# Allegro board remotepanasonicDB9.brd
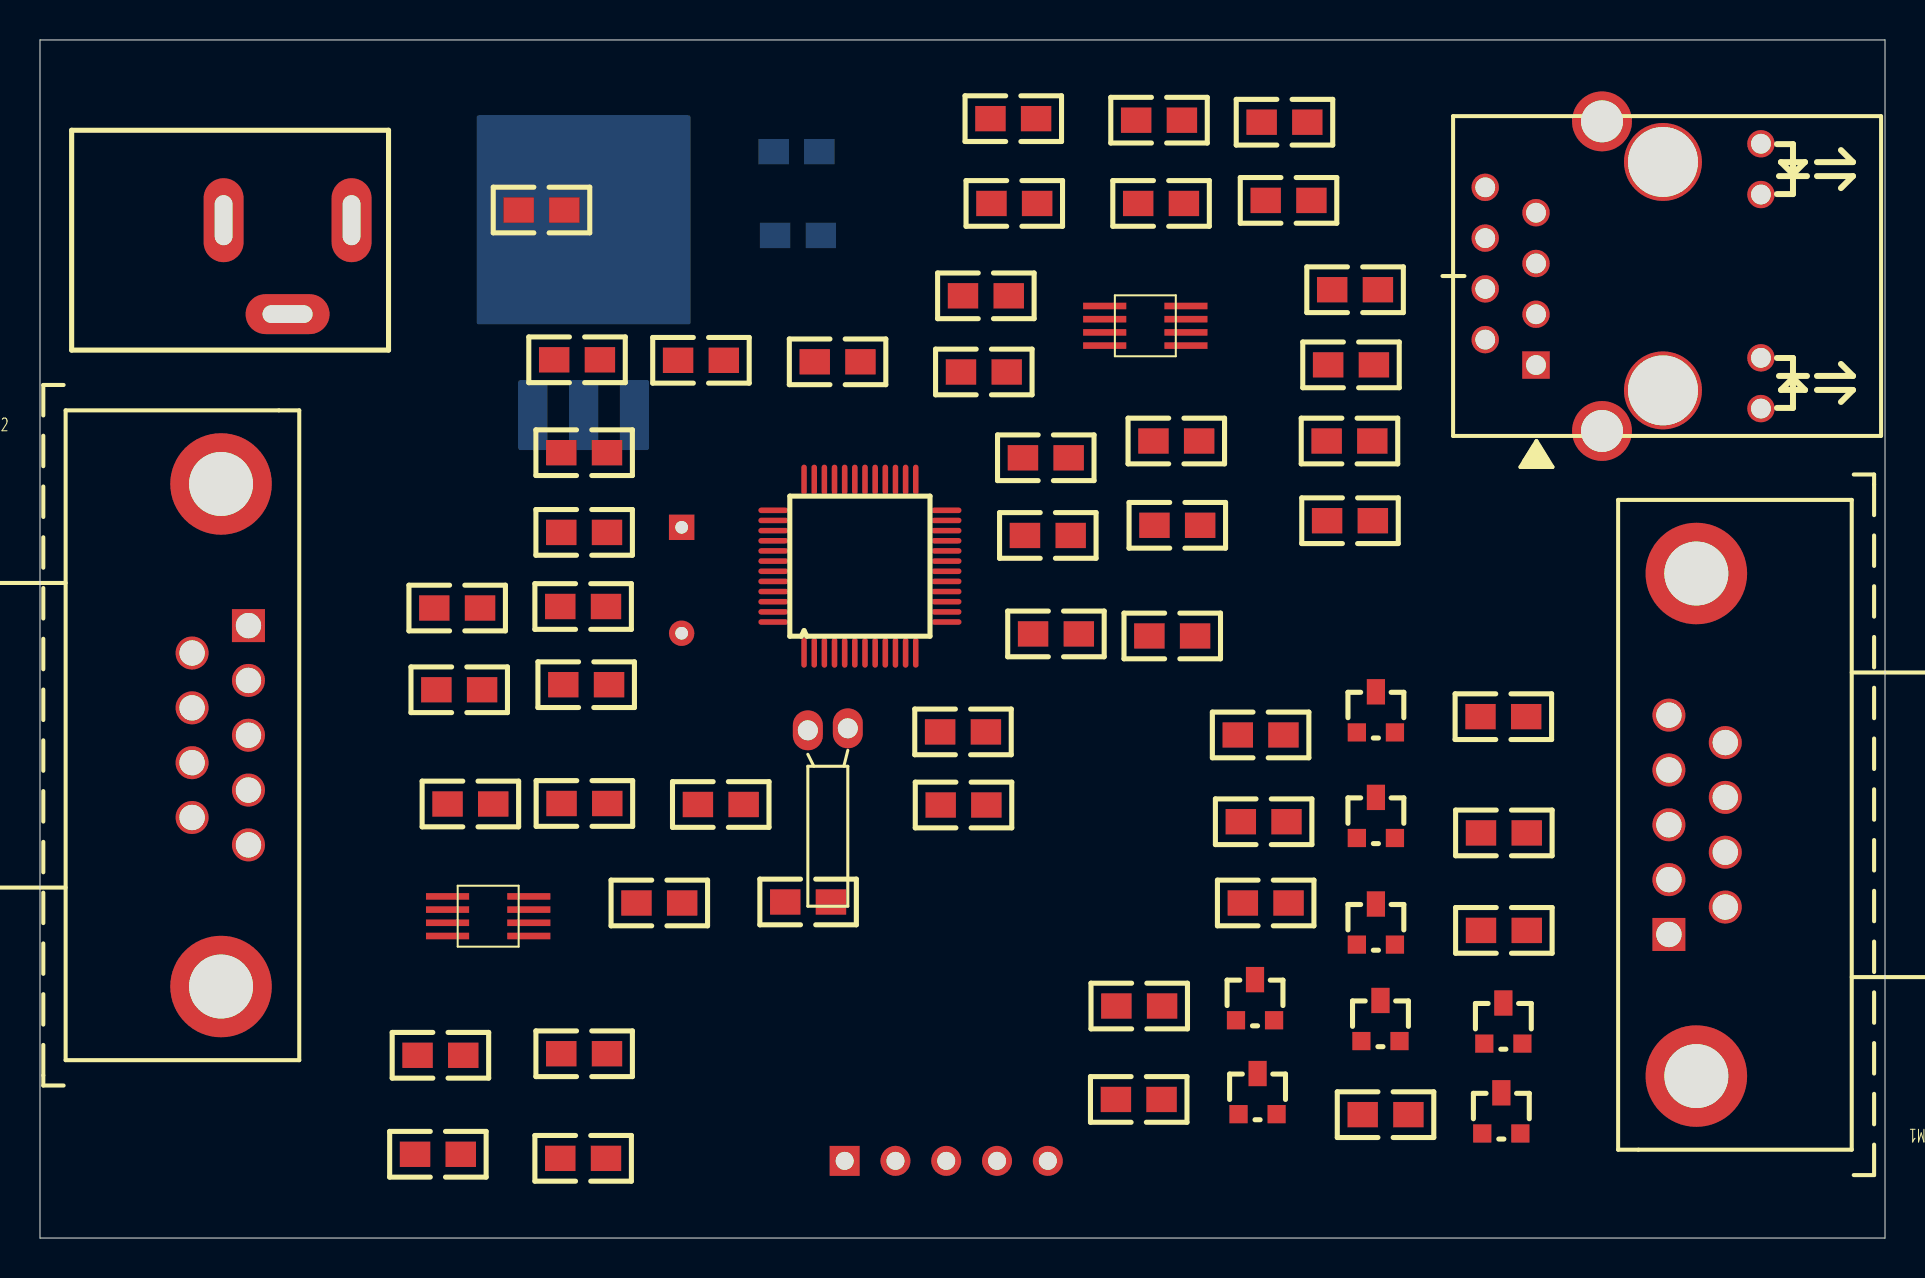
[diagram p0: board, top side]
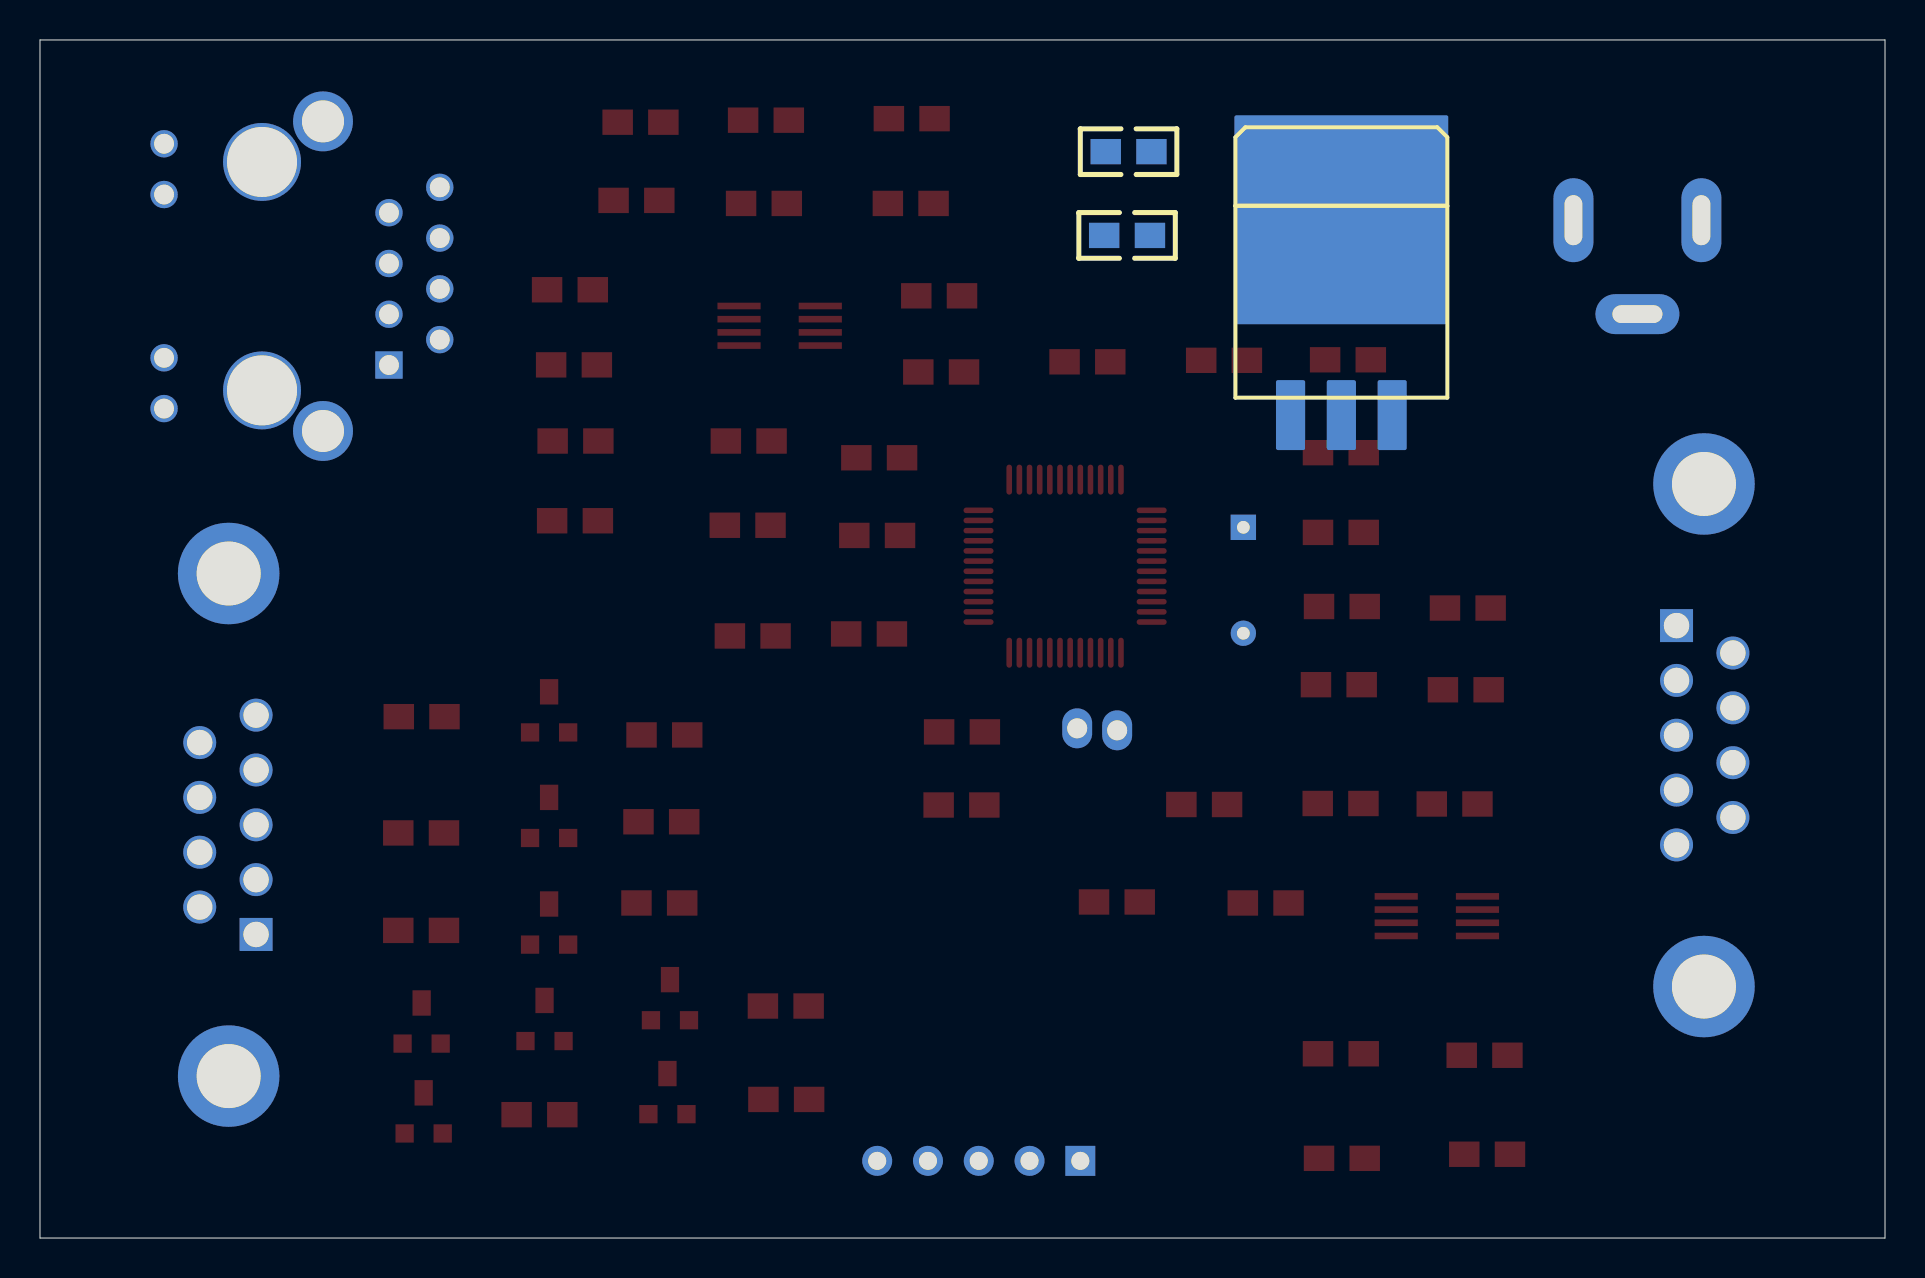
[diagram p1: board, bottom side, seen from below]

Outline 92.28 x 59.94 mm; copper layers: TOP, BOTTOM. Coordinates in mm from the lower left corner of the outline.
Outline path: 0,59.94 92.28,59.94 92.28,0 0,0 0,59.94

## Placement (name value [footprint] x y rotation side)
C1  20p  [0805]  27.32 27.69 0 top
C2  20p  [0805]  27.17 31.6 0 top
C3  10u  [0805]  26.86 43.94 0 top
C4  10U  [0805]  37.83 54.36 180 bottom
C5  22U  [0805]  37.91 50.16 180 bottom
C6  20p  [0805]  46.16 25.32 0 top
C7  20p  [0805]  34.05 21.69 0 top
C8  10u  [0805]  50.81 30.23 0 top
C9  0.1u  [0805]  47.21 43.33 0 top
C10  0.1u  [0805]  50.41 35.15 0 top
C11  0.1u  [0805]  38.42 16.81 0 top
COM1  BOXCONN_DB9  [DB9RA_M]  81.47 20.68 180 top
COM2  BOXCONN_DB9  [DB9RA_M]  10.43 25.16 0 top
IED1  <Value>  [HDR1X5]  40.25 3.86 0 top
L1  IND_MOLDED  [0805]  39.89 43.84 0 top
LED_3.1  RED  [0805]  62.45 51.92 0 top
LED_3.2  RED  [0805]  56.07 51.77 0 top
LED_3.3  RED  [0805]  20.03 9.14 0 top
LED_3.4  RED  [0805]  27.22 9.22 0 top
LED_3.5  RED  [0805]  55.97 55.93 0 top
Q1  2N7002LT1  [SOT23_B]  66.81 26.29 0 top
Q2  2N7002LT1  [SOT23_B]  66.81 21.01 0 top
Q3  2N7002LT1  [SOT23_B]  66.81 15.67 0 top
Q4  2N7002LT1  [SOT23_B]  73.19 10.72 0 top
Q5  2N7002LT1  [SOT23_B]  60.77 11.89 0 top
Q6  2N7002LT1  [SOT23_B]  60.9 7.19 0 top
Q7  2N7002LT1  [SOT23_B]  73.09 6.22 0 top
Q8  2N7002LT1  [SOT23_B]  67.04 10.85 0 top
R1  33  [0805]  27.22 39.29 0 top
R2  1M  [0805]  27.22 35.31 0 top
R3  10k  [0805]  33.06 43.92 0 top
R4  10M  [0805]  46.19 21.67 0 top
R5  22  [0805]  56.88 35.66 0 top
R6  22  [0805]  56.63 30.12 0 top
R7  4.7k  [0805]  65.52 35.89 0 top
R8  10k  [0805]  56.83 39.88 0 top
R9  100  [0805]  65.49 39.88 0 top
R10  100  [0805]  65.57 43.69 0 top
R11  10k  [0805]  50.3 39.04 0 top
R12  330  [0805]  62.24 55.83 0 top
R13  4.7k  [0805]  73.19 26.09 0 top
R14  10k  [0805]  73.22 20.27 0 top
R15  15k  [0805]  73.22 15.39 0 top
R16  330  [0805]  48.73 51.77 0 top
R17  4.7k  [0805]  54.98 11.61 0 top
R18  10k  [0805]  54.95 6.93 0 top
R19  15k  [0805]  67.3 6.17 0 top
R25  4.7k  [0805]  65.77 47.45 0 top
R26  4.7k  [0805]  30.98 16.76 0 top
R27  100  [0805]  61.05 25.17 0 top
R28  4.7k  [0805]  61.2 20.83 0 top
R29  10k  [0805]  20.87 31.52 0 top
R30  10k  [0805]  20.97 27.43 0 top
R31  100  [0805]  61.3 16.76 0 top
R32  22  [0805]  21.53 21.72 0 top
R33  22  [0805]  27.23 21.74 0 top
R34  0  [0805]  47.31 47.14 0 top
R35  0  [0805]  25.08 51.44 0 top
R36  330  [0805]  19.9 4.19 0 top
R37  330  [0805]  27.17 3.99 0 top
R38  330  [0805]  48.68 56.01 0 top
U1  DC205A  [DC205]  15.58 50.93 270 top
U2  AMS1086CM-3.3  [TO262]  27.19 47.68 180 bottom
U3  NUC122LC1AN  [NUC122LQFP48]  38.21 29.29 0 top
U5  MAX488  [MAX485]  55.28 45.64 0 top
U8  MAX488  [MAX485]  22.42 16.1 0 top
U10  RJ45  [HR911105A]  70.68 48.13 270 top
Y1  12M  [XALTDIP2]  32.09 35.56 270 top
Y2  32k  [XTAL-3_4MM-2P]  40.7 25.6 180 top

## Library data of the parts
C1-C3 C6-C11 = CAPACITOR NON-POL
C4 C5 = CAP NP
COM1 COM2 = CONNECTOR DB9_1
IED1 = CON5
L1 R1-R11 R13-R15 R17-R19 R25-R35 = R
LED_3.1-LED_3.5 = LED
Q1-Q8 = NPN_3
R12 R16 R36-R38 = RES1
U1 = DC205A
U2 = AMS1117: Tolerance: RichardLC; User Part Number: pn
U3 = NUC122LC1AN
U5 U8 = MAX485
U10 = RJ45
Y1 Y2 = CRYSTAL

## Footprints (pads in the part's own frame, mm; a bottom-side part is the same pattern mirrored in y, then rotated)
0805
  rect 1.524x1.27 smd: 1(-1.143,0) 2(1.143,0)
DB9RA_M
  rect 1.651x1.651 hole 1.27: 1(0,5.486)
  round 1.651 hole 1.27: 2(0,2.743) 3(0,0) 4(0,-2.743) 5(0,-5.486) 6(-2.819,4.115) 7(-2.819,1.372) 8(-2.819,-1.372) 9(-2.819,-4.115)
  round 5.08 hole 3.2: 10(-1.372,12.573) 11(-1.372,-12.573)
DC205
  oval 4.2x2 hole 2.5x0.889: 1(0,0) 2(0,-6.4)
  oval 2x4.2 hole 0.889x2.5: 3(4.7,-3.2)
HDR1X5
  rect 1.5x1.5 hole 0.9: 1(0,0)
  round 1.5 hole 0.9: 2(2.54,0) 3(5.08,0) 4(7.62,0) 5(10.16,0)
HR911105A
  round 3.9 hole 3.5 unplated: (-5.707,10.498) (5.723,10.498)
  rect 1.372x1.372 hole 0.991: 1(4.453,4.148)
  round 1.372 hole 0.991: 2(3.183,1.608) 3(1.913,4.148) 4(0.643,1.608) 5(-0.627,4.148) 6(-1.897,1.608) 7(-3.167,4.148) 8(-4.437,1.608) 9(6.633,15.398) 10(4.093,15.398) 11(-4.077,15.398) 12(-6.617,15.398)
  round 2.997 hole 2.1: M3(-7.737,7.448) M4(7.753,7.448)
MAX485
  rect 2.159x0.33 smd: 1(-2.032,0.991) 2(-2.032,0.33) 3(-2.032,-0.33) 4(-2.032,-0.991) 5(2.032,-0.991) 6(2.032,-0.33) 7(2.032,0.33) 8(2.032,0.991)
NUC122LQFP48
  oval 0.279x1.5 smd: 1(0,0) 2(0.508,0) 3(1.016,0) 4(1.524,0) 5(2.032,0) 6(2.54,0) 7(3.048,0) 8(3.556,0) 9(4.064,0) 10(4.572,0) 11(5.08,0) 12(5.588,0) 25(5.588,8.66) 26(5.08,8.66) 27(4.572,8.66) 28(4.064,8.66) 29(3.556,8.66) 30(3.048,8.66) 31(2.54,8.66) 32(2.032,8.66) 33(1.524,8.66) 34(1.016,8.66) 35(0.508,8.66) 36(0,8.66)
  oval 1.5x0.279 smd: 13(7.124,1.536) 14(7.124,2.044) 15(7.124,2.552) 16(7.124,3.06) 17(7.124,3.568) 18(7.124,4.076) 19(7.124,4.584) 20(7.124,5.092) 21(7.124,5.6) 22(7.124,6.108) 23(7.124,6.616) 24(7.124,7.124) 37(-1.536,7.124) 38(-1.536,6.616) 39(-1.536,6.108) 40(-1.536,5.6) 41(-1.536,5.092) 42(-1.536,4.584) 43(-1.536,4.076) 44(-1.536,3.568) 45(-1.536,3.06) 46(-1.536,2.552) 47(-1.536,2.044) 48(-1.536,1.536)
SOT23_B
  rect 0.914x1.27 smd: D(0,1.041)
  rect 0.914x0.914 smd: G(-0.953,-0.991) S(0.953,-0.991)
TO262
  custom 1.46x3.5 smd: 1(-2.54,-6.5) 2(0,-6.5) 3(2.54,-6.5)
  custom 10.7x10.46 smd: 4(0,3.27)
XALTDIP2
  rect 1.27x1.27 hole 0.635: 1(0,0)
  round 1.27 hole 0.635: 2(5.3,0)
XTAL-3_4MM-2P
  oval 1.5x2 hole 1: 1(0.3,0.1) 2(2.3,0.2)

## Nets
GND: C4.2 C5.2 COM1.1 COM2.5 COM2.6 IED1.5 LED_3.2.2 Q4.S Q8.S R13.1 R14.1 R15.1 R17.1 R18.1 R19.1 R34.1 R35.1 U1.2(GND) U2.1(GND) U10.1
GND_POWER: C1.1 C2.1 C3.1 C6.1 C7.1 C8.1 C9.1 C10.1 C11.1 R8.1 R11.1 R25.1 R28.1 R29.1 R30.1 U3.1(PVSS) U3.12(VSS) U5.4(GND) U8.4(GND)
VCC: C5.1 C9.2 C11.2 IED1.1 L1.2 R3.1 R7.2 R12.1 R16.1 R26.2 R36.1 R37.1 R38.1 U2.2(VOUT) U2.4(TAB) U3.11(VDD) U3.13(VBUS) U5.1(VCC) U8.1(VCC)
VCC5: C4.1 U1.1(VCC) U2.3(VIN)
422AI: R7.1 R9.1 U5.8(A) U10.6
422AO: COM1.2 R26.1 R27.1 U8.8(A)
422BI: R9.2 R25.2 U5.7(B) U10.3
422BO: COM1.5 R27.2 R28.2 U8.7(B)
422YI: R10.2 U5.5(Y) U10.5
422YO: COM1.3 R31.2 U8.5(Y)
422ZI: R10.1 U5.6(Z) U10.4
422ZO: COM1.9 R31.1 U8.6(Z)
A_AUDIO: COM2.7 Q4.D
A_AUDIO-1: Q8.D
A_INPUT: Q4.G U3.26(PC12)
A_INPUT1: Q8.G U3.41(PD3)
B_AUDIO: COM2.2 Q1.D Q2.D Q3.D
B_AUDIO-1: COM2.4 Q5.D Q6.D Q7.D
B_NET1: Q1.G U3.22(PC0/SPISS00)
B_NET2: Q2.G U3.21(PC1/SPICLK0)
B_NET3: Q3.G U3.20(PC2/MISO00)
B_NET11: Q5.G U3.38(PD0)
B_NET21: Q6.G U3.39(PD1)
B_NET31: Q7.G U3.40(PD2)
ICECLK: IED1.3 U3.36(ICE_CK)
ICEDATA: IED1.2 U3.35(ICE_DAT)
ICEREST: C3.2 IED1.4 R3.2 U3.46(/RESET)
PC8: LED_3.1.2 U3.30(PC8/SPISS10)
PC9: LED_3.3.2 U3.29(PC9/SPICLK1)
PC10: LED_3.4.2 U3.28(PC10/MISO10)
PC11: LED_3.5.2 U3.27(PC11/MOS110)
RXI: R5.1 R8.2 U5.2(RO)
RXO: R30.2 R32.1 U8.2(RO)
TXI: R6.1 R11.2 U5.3(DI)
TXO: R29.2 R33.1 U8.3(DI)
N5217252: C1.2 R1.1 R2.2 Y1.2
N5217271: C2.2 R2.1 U3.45(XT1_IN) Y1.1
N5217301: R1.2 U3.44(XT1_OUT)
N5217606: L1.1 U3.37(AVDD)
N5217811: C6.2 R4.2 U3.2(X32O) Y2.2
N5217823: C7.2 R4.1 U3.3(X321) Y2.1
N5218166: R5.2 U3.6(RXD1/PB4)
N5218170: R6.2 U3.7(TXD1/PB5)
N5218267: C8.2 U3.10(LDO)
N5218423: C10.2 U3.14(VDD33)
N5271660: Q1.S R13.2
N5271664: Q2.S R14.2
N5271668: Q3.S R15.2
N5281203: Q5.S R17.2
N5281215: Q7.S R19.2
N5281219: Q6.S R18.2
N5286003: R32.2 U3.17(PB0/RXD0)
N5286012: R33.2 U3.18(PB1/TXD0)
N5287388: R34.2 U10.2
N5287624: COM1.4 R35.2
N5293616: COM2.11
N5294368: COM2.3
N52191170: LED_3.2.1 R16.2
N52191690: LED_3.1.1 R12.2
N52878630: LED_3.3.1 R36.2
N52879570: LED_3.4.1 R37.2
N52880520: LED_3.5.1 R38.2

Pads without a net: COM1 6 7 8 10 11; COM2 1 8 9 10; U1 3; U3 4 5 8 9 15 16 19 23 24 25 31 32 33 34 42 43 47 48; U10 7 8 9 10 11 12 M3 M4
